# EAGLE board sensor (EAGLE 9.7.0)

Size 271.07 x 98.99 mm. Coordinates in mm from the lower left corner, seen from the top.
Outline: 0,0 271.07,0 271.07,98.99 0,98.99 0,0
Copper layers (1*16): Top 0.035mm / dielectric 1.5mm / Bottom 0.035mm
Design rules "default": minimum track width 6mil, minimum drill 0.35mm, track to track 6mil, track to pad 6mil, pad to pad 6mil, via to via 6mil, smd to smd 6mil, copper to edge 40mil, drill to drill 6mil, minimum pad ring 10mil, minimum via ring 8mil, stop-mask expansion 4mil, vias tented up to drill 0mil, thermal gap 10mil

## Footprints (pad centres in the part's own frame; a part is rotated, then mirrored left to right if it is on the bottom)
LEDRD254W60D565H860B_G = drill 0.981 pad 1.581: 1 -1.27,0; 2 1.27,0
LEDRD254W60D565H860B_Y = drill 0.981 pad 1.581: 1 -1.27,0; 2 1.27,0
LEDRD254W60D565H860B = drill 0.981 pad 1.581: 1 -1.27,0; 2 1.27,0
PIEZO = drill 1 pad 1.6: 1 -3.5,0; 2 3.5,0
RESAD1016W63L850D250B = drill 0.83 pad 1.43: 1 -5.08,0; 2 5.08,0
HA-06-SM065 = drill 1 pad 1.676: 1 -2.54,-2.54; 2 0,2.54; 3 2.54,-2.54
ARDUINO-UNO-R3-SHIELD = drill 1.016 pad 1.88: 3.3V 24.13,-2.54; 5V 24.13,0; A0 24.13,12.7; A1 24.13,15.24; A2 24.13,17.78; A3 24.13,20.32; A4 24.13,22.86; A5 24.13,25.4; AREF -24.13,-13.97; D2 -24.13,20.32; D3 -24.13,17.78; D4 -24.13,15.24; D5 -24.13,12.7; D6 -24.13,10.16; D7 -24.13,7.62; D8 -24.13,3.81; D9 -24.13,1.27; D10 -24.13,-1.27; D11 -24.13,-3.81; D12 -24.13,-6.35; D13 -24.13,-8.89; GND@0 24.13,2.54; GND@1 24.13,5.08; GND@2 -24.13,-11.43; IOREF 24.13,-7.62; NC 24.13,-10.16; RES 24.13,-5.08; RX -24.13,25.4; SCL -24.13,-19.05; SDA -24.13,-16.51; TX -24.13,22.86; VIN 24.13,7.62
JHD-162A = drill 1.016 long: 1 -19.05,0; 2 -16.51,0; 3 -13.97,0; 4 -11.43,0; 5 -8.89,0; 6 -6.35,0; 7 -3.81,0; 8 -1.27,0; 9 1.27,0; 10 3.81,0; 11 6.35,0; 12 8.89,0; 13 11.43,0; 14 13.97,0; 15 16.51,0; 16 19.05,0

## Placement (x,y rotation side)
D1  GREEN  [LEDRD254W60D565H860B_G]  231.39,81.48 180 top
D2  YELLOW  [LEDRD254W60D565H860B_Y]  239.01,81.48 180 top
D3  RED  [LEDRD254W60D565H860B]  246.63,81.48 180 top
PIEZO1  PIEZO  [PIEZO]  259.33,63.7 0 top
R2  220  [RESAD1016W63L850D250B]  151.47,84.26 270 top
R3  1k  [RESAD1016W63L850D250B]  230.12,66.24 90 top
R4  1k  [RESAD1016W63L850D250B]  237.74,66.24 90 top
R5  1k  [RESAD1016W63L850D250B]  245.36,66.24 90 top
RPOT2  250k  [HA-06-SM065]  110.83,58.86 0 top
RPOTSENSOR_DE_CHUVA_  250k  [HA-06-SM065]  209.8,73.86 0 top
RPOTSENSOR_DE_NÍVEL_  250k  [HA-06-SM065]  222.5,73.86 0 top
U3  ARDUINO-UNO-R3-SHIELD  [ARDUINO-UNO-R3-SHIELD]  47.88,69.14 270 top
U4  LCD-16X2JHD-162A  [JHD-162A]  132.76,36.63 0 top

## Library data of the parts
D1 = Tinkercad; CATEGORY: Opto-Electronic; SUB-CATEGORY: LED; VALUE: LED_GREEN
D2 = Tinkercad; CATEGORY: Opto-Electronic; SUB-CATEGORY: LED; VALUE: LED_YELLOW
D3 = Tinkercad; CATEGORY: Opto-Electronic; SUB-CATEGORY: LED; VALUE: LED_RED
PIEZO1 R2-R5 RPOT2 RPOTSENSOR_DE_CHUVA_ RPOTSENSOR_DE_NÍVEL_ U3 U4 = Tinkercad

## Nets
D1_C: D1.2 R3.2
D2_C: D2.2 R4.2
D3_C: D3.2 R5.2
U3_5V: R2.1 RPOT2.1 RPOTSENSOR_DE_CHUVA_.1 RPOTSENSOR_DE_NÍVEL_.1 U3.5V U4.2
U3_A5: RPOTSENSOR_DE_CHUVA_.2 U3.A5
U3_D2: U3.D2 U4.14
U3_D3: U3.D3 U4.13
U3_D4: U3.D4 U4.12
U3_D5: U3.D5 U4.11
U3_D6: D1.1 U3.D6
U3_D7: D2.1 U3.D7
U3_D8: D3.1 U3.D8
U3_D9: RPOTSENSOR_DE_NÍVEL_.2 U3.D9
U3_D11: U3.D11 U4.6
U3_D12: U3.D12 U4.4
U3_D13: PIEZO1.1 U3.D13
U3_GND: PIEZO1.2 R3.1 R4.1 R5.1 RPOT2.3 RPOTSENSOR_DE_CHUVA_.3 RPOTSENSOR_DE_NÍVEL_.3 U3.GND@0 U3.GND@1 U3.GND@2 U4.1 U4.5 U4.16
U4_LED+: R2.2 U4.15
U4_VO: RPOT2.2 U4.3

## Tracks (layer width: path | path; a pad name or v marks a point on that pad's centre or on a via)
D1_C  (1 unrouted)
D2_C  (1 unrouted)
D3_C  (1 unrouted)
U3_5V  (5 unrouted)
U3_A5  (1 unrouted)
U3_D2  (1 unrouted)
U3_D3  (1 unrouted)
U3_D4  (1 unrouted)
U3_D5  (1 unrouted)
U3_D6  (1 unrouted)
U3_D7  (1 unrouted)
U3_D8  (1 unrouted)
U3_D9  (1 unrouted)
U3_D11  (1 unrouted)
U3_D12  (1 unrouted)
U3_D13  (1 unrouted)
U3_GND  (12 unrouted)
U4_LED+  (1 unrouted)
U4_VO  (1 unrouted)